# EAGLE board Lecture10_Example (EAGLE 9.0.1)
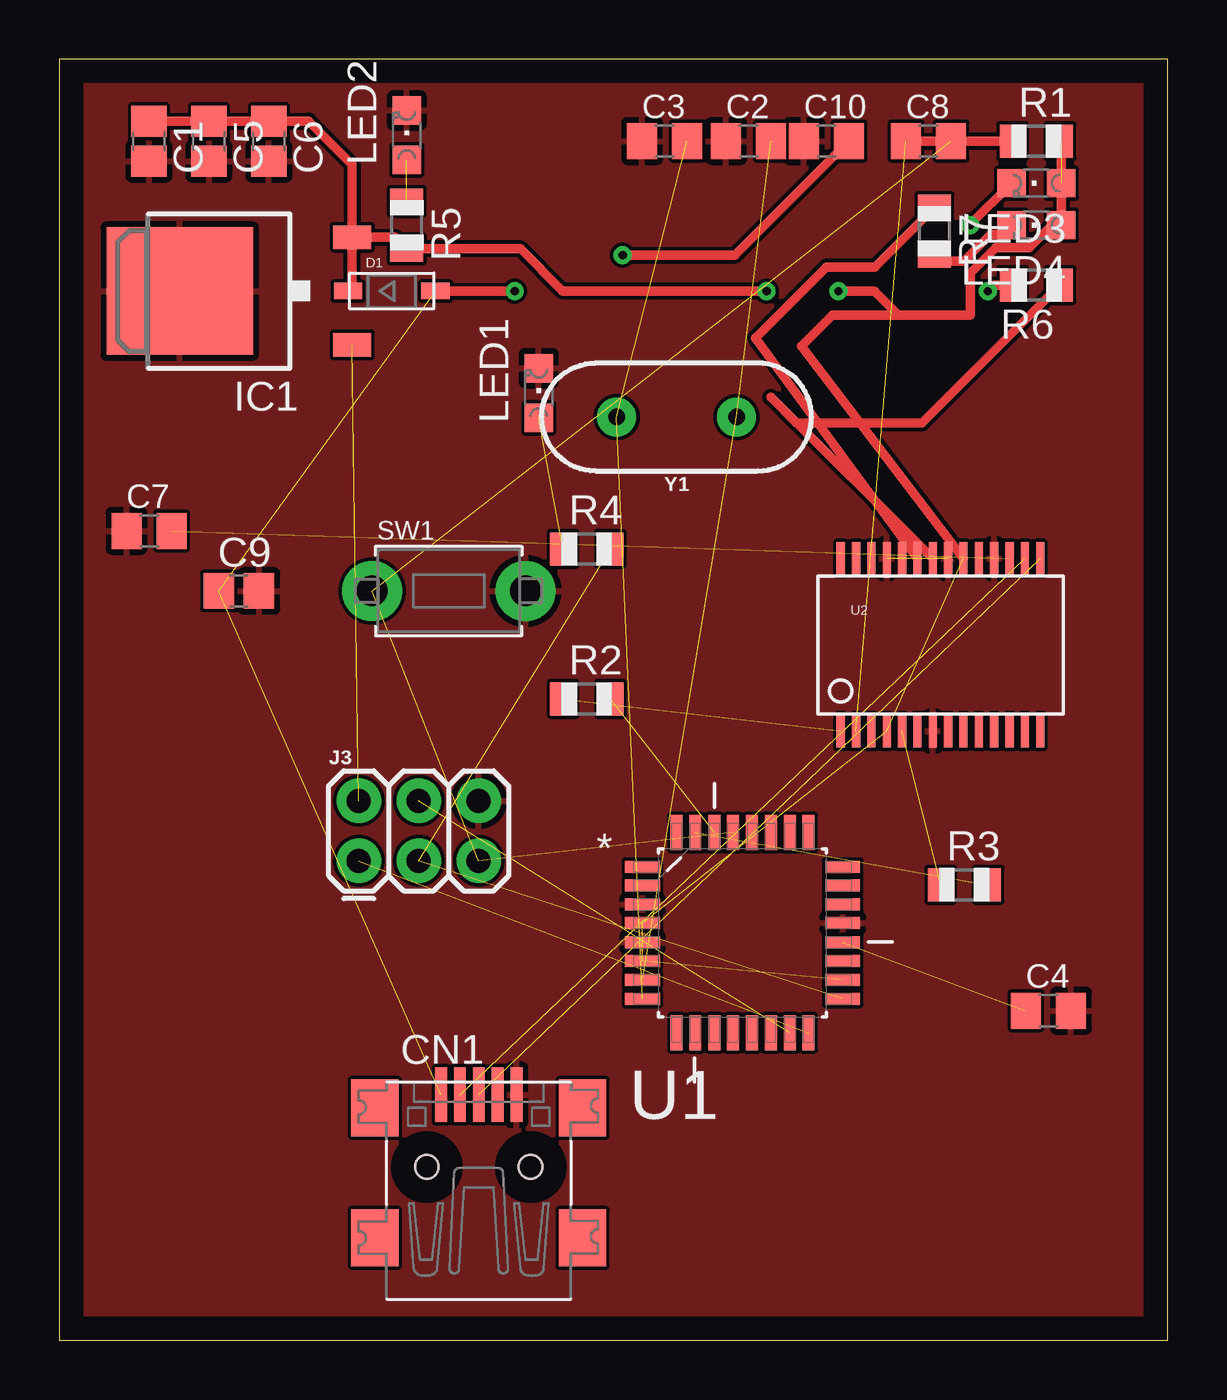
[diagram p0: board, top side]
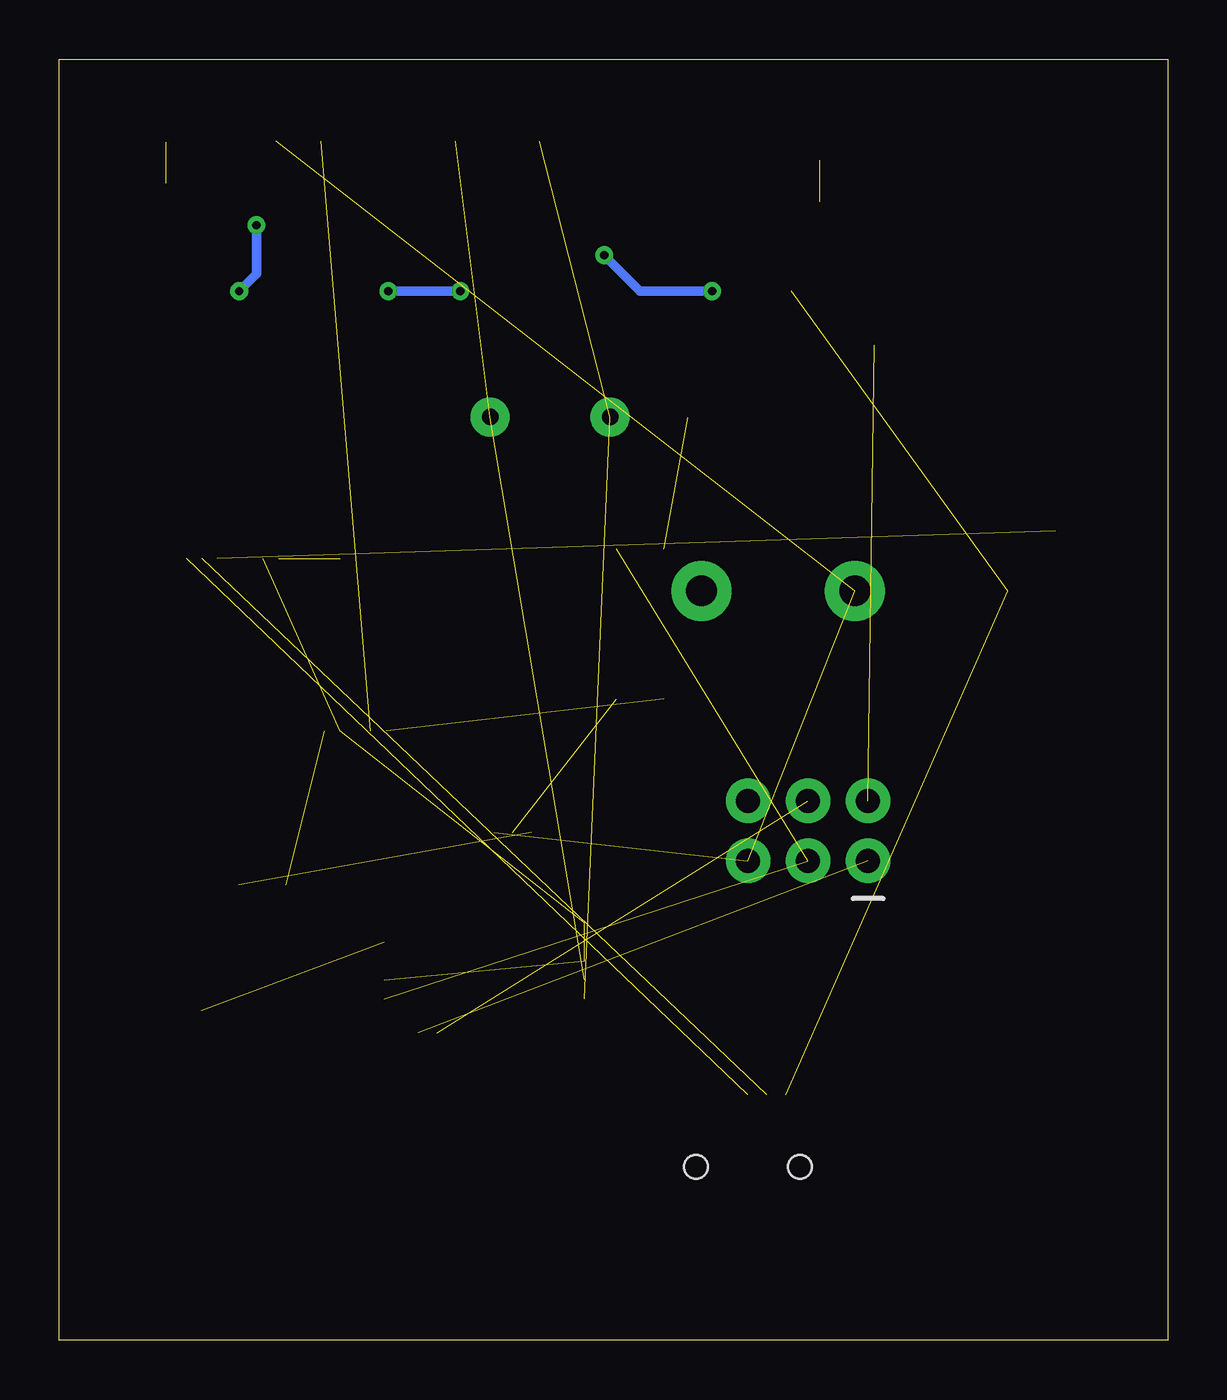
[diagram p1: board, bottom side, seen from below]

Size 46.97 x 54.28 mm. Coordinates in mm from the lower left corner, seen from the top.
Outline: 0,0 46.97,0 46.97,54.28 0,54.28 0,0
Copper layers (1*16): Top 0.035mm / dielectric 1.5mm / Bottom 0.035mm
Design rules "default": minimum track width 6mil, minimum drill 0.35mm, track to track 6mil, track to pad 6mil, pad to pad 6mil, via to via 6mil, smd to smd 6mil, copper to edge 40mil, drill to drill 6mil, minimum pad ring 10mil, minimum via ring 8mil, stop-mask expansion 4mil, vias tented up to drill 0mil, thermal gap 10mil

## Footprints (pad centres in the part's own frame; a part is rotated, then mirrored left to right if it is on the bottom)
C0805 = smd 1.3 x 1.5: 1 -0.85,0; 2 0.85,0
0805 = smd 1.27 x 1.524: 1 -0.953,0; 2 0.953,0
USB-MINIB = smd 0.5 x 2.308: D+ 0,4.064; D- -0.8,4.064; GND 1.6,4.064; ID 0.8,4.064; VBUS -1.6,4.064 | smd 2 x 2.4: GND1 -4.4,-2; GND2 -4.4,3.5; GND3 4.4,3.5; GND4 4.4,-2 | hole 1: -2.2,1; 2.2,1
SOD-123 = smd 1.2 x 0.7: A 1.85,0; C -1.85,0
TO252 = smd 1 x 1.6: 1 -2.28,-4.8; 2 2.28,-4.8 | smd 5.4 x 6.2: 3 0,2.5
2X3 = drill 1.016 pad 1.88: 1 0,0; 2 0,2.54; 3 2.54,0; 4 2.54,2.54; 5 5.08,0; 6 5.08,2.54
CHIPLED_0805 = smd 1.2 x 1.2: A 0,-1.05; C 0,1.05
R0805 = smd 1.1 x 1.4: 1 -1,0; 2 1,0
TACT_PANA-EVQ = drill 1.3 pad 2.54: P$1 -3.25,0; P$2 3.25,0
QFP80P900X900X120-32N = smd 1.473 x 0.508: 1 -4.242,2.794; 2 -4.242,2.007; 3 -4.242,1.194; 4 -4.242,0.406; 5 -4.242,-0.406; 6 -4.242,-1.194; 7 -4.242,-2.007; 8 -4.242,-2.794; 17 4.242,-2.794; 18 4.242,-2.007; 19 4.242,-1.194; 20 4.242,-0.406; 21 4.242,0.406; 22 4.242,1.194; 23 4.242,2.007; 24 4.242,2.794 | smd 0.508 x 1.473: 9 -2.794,-4.242; 10 -2.007,-4.242; 11 -1.194,-4.242; 12 -0.406,-4.242; 13 0.406,-4.242; 14 1.194,-4.242; 15 2.007,-4.242; 16 2.794,-4.242; 25 2.794,4.242; 26 2.007,4.242; 27 1.194,4.242; 28 0.406,4.242; 29 -0.406,4.242; 30 -1.194,4.242; 31 -2.007,4.242; 32 -2.794,4.242
SSOP28DB = smd 0.348 x 1.397: 1 -4.225,-3.656; 2 -3.575,-3.656; 3 -2.925,-3.656; 4 -2.275,-3.656; 5 -1.625,-3.656; 6 -0.975,-3.656; 7 -0.325,-3.656; 8 0.325,-3.656; 9 0.975,-3.656; 10 1.625,-3.656; 11 2.275,-3.656; 12 2.925,-3.656; 13 3.575,-3.656; 14 4.225,-3.656; 15 4.225,3.656; 16 3.575,3.656; 17 2.925,3.656; 18 2.275,3.656; 19 1.625,3.656; 20 0.975,3.656; 21 0.325,3.656; 22 -0.325,3.656; 23 -0.975,3.656; 24 -1.625,3.656; 25 -2.275,3.656; 26 -2.925,3.656; 27 -3.575,3.656; 28 -4.225,3.656
HC49US = drill 0.7 pad 1.651: 1 -2.54,0; 2 2.54,0

## Placement (x,y rotation side)
C1  0.1uF  [C0805]  3.81,50.8 270 top
C2  15pF  [0805]  29.21,50.8 0 top
C3  15pF  [0805]  25.65,50.8 0 top
C4  0.1uF  [0805]  41.91,13.97 0 top
C5  4.7uF  [C0805]  6.35,50.8 270 top
C6  4.7uF  [C0805]  8.89,50.8 270 top
C7  0.1uF  [0805]  3.81,34.29 0 top
C8  0.1uF  [0805]  36.83,50.8 0 top
C9  4.7uF  [C0805]  7.62,31.75 0 top
C10  0.1uF  [0805]  32.51,50.8 0 top
CN1  [USB-MINIB]  17.78,6.35 0 top
D1  [SOD-123]  14.1,44.45 0 top
IC1  7824DT  [TO252]  7.62,44.45 90 top
J3  FEMALE 2x3  [2X3]  12.7,20.32 0 top
LED1  [CHIPLED_0805]  20.32,40.13 0 top
LED2  [CHIPLED_0805]  14.73,51.05 0 top
LED3  [CHIPLED_0805]  41.4,49.02 90 top
LED4  [CHIPLED_0805]  41.4,47.24 90 top
R1  680  [R0805]  41.4,50.8 0 top
R2  100  [R0805]  22.35,27.18 0 top
R3  100  [R0805]  38.35,19.3 0 top
R4  680  [R0805]  22.35,33.53 0 top
R5  680  [R0805]  14.73,47.24 270 top
R6  680  [R0805]  41.4,44.7 180 top
R7  680  [R0805]  37.08,46.99 270 top
SW1  [TACT_PANA-EVQ]  16.51,31.75 0 top
U1  ATMEGA328P-AU  [QFP80P900X900X120-32N]  28.96,17.27 0 top
U2  [SSOP28DB]  37.34,29.46 0 top
Y1  16MHz  [HC49US]  26.16,39.12 180 top

## Library data of the parts
C1 C5 C6 C9 CN1 D1 IC1 LED1-LED4 R1-R7 SW1 = adafruit
C2-C4 C7 C8 C10 = cap-master
J3 = SparkFun-Connectors; PROD_ID: CONN-11566
U1 = Atmel-ATMEGA328P-AU; DESCRIPTION: 8-bit Microcontroller with In-System Programmable Flash; MPN: ATMEGA328P-AU; OC_FARNELL: 1715486; OC_NEWARK: 14R4631; PACKAGE: TQFP-32; SUPPLIER: Atmel
U2 = microbuilder
Y1 = SparkFun-Clocks; PROD_ID: XTAL-08181; SF_ID: COM-00536

## Nets
3.3V: C7.2 U2.17
+5V: C1.1 C5.1 C6.1 D1.C IC1.2 LED3.A LED4.A R1.2 R5.2 U1.4 U1.6 U1.18 U2.4 U2.20
A0: U1.23
A1: U1.24
A2: U1.25
A3: U1.26
A4: U1.27
A5: U1.28
A6: U1.19
A7: U1.22
AREF: C4.1 U1.20
D0/RX: R2.1 U2.1
D1/TX: R3.1 U2.5
D2: U1.32
D3: U1.1
D4: U1.2
D5: U1.9
D6: U1.10
D7: U1.11
D8: U1.12
D9: U1.13
D10: U1.14
D11/MOSI: J3.4 U1.15
D12/MISO: J3.1 U1.16
D13/SCK: J3.3 R4.2 U1.17
GND: C1.2 C2.1 C3.1 C4.2 C5.2 C6.2 C7.1 C9.2 C10.1 CN1.GND IC1.3 J3.6 LED1.C LED2.C SW1.P$2 U1.3 U1.5 U1.21 U2.7 U2.18 U2.21 U2.25
N$1: C3.2 U1.8 Y1.2
N$2: C2.2 U1.7 Y1.1
N$4: LED2.A R5.1
N$5: CN1.D+ U2.15
N$6: CN1.D- U2.16
N$7: R2.2 U1.30
N$8: R3.2 U1.31
N$9: LED3.C R6.2
N$10: LED1.A R4.1
N$12: R6.1 U2.22
N$13: R7.1 U2.23
N$14: C8.1 U2.2
N$15: LED4.C R7.2
RESET: C8.2 J3.5 R1.1 SW1.P$1 U1.29
VIN: IC1.1 J3.2
VUSB: C9.1 C10.2 CN1.VBUS D1.A

## Tracks (layer width: path | path; a pad name or v marks a point on that pad's centre or on a via)
3.3V  (1 unrouted)
+5V  (via drill 0.35)  (5 unrouted)
  Top 0.406: C1.1 C5.1 C6.1 10.58,51.65 12.42,49.81 IC1.2 | D1.C 12.42,44.62 IC1.2 | IC1.2 14.25,46.73 R5.2 19.54,46.24 21.34,44.45 v29.97,44.45 | 42.42,50.78 R1.2 42.45,50.75 LED4.A 42.05,47.24 41.1,46.29 39.68,46.29 38.61,45.21 38.61,43.43 35.56,43.43 | 35.56,43.43 32.77,43.43 31.45,42.12 U2.20 | 35.56,43.43 34.54,44.45 v33.02,44.45
  Bottom 0.406: v33.02,44.45 v29.97,44.45
AREF  (1 unrouted)
D0/RX  (1 unrouted)
D1/TX  (1 unrouted)
D11/MOSI  (1 unrouted)
D12/MISO  (1 unrouted)
D13/SCK  (2 unrouted)
GND  (1 unrouted)
  pour Top: 0,0 0,54.61 46.99,54.61 46.99,0
N$1  (2 unrouted)
N$2  (2 unrouted)
N$4  (1 unrouted)
N$5  (1 unrouted)
N$6  (1 unrouted)
N$7  (1 unrouted)
N$8  (1 unrouted)
N$9  (via drill 0.35)
  Top 0.406: LED3.C 38.61,47.28 v38.61,47.24 | v39.34,44.45 39.6,44.7 R6.2
  Bottom 0.406: v38.61,47.24 38.61,45.18 v39.34,44.45
N$10  (1 unrouted)
N$12
  Top 0.406: R6.1 36.56,38.86 31.24,38.86 30.16,39.95 U2.22
N$13
  Top 0.406: R7.1 34.56,45.47 32.51,45.47 29.5,42.46 U2.23
N$14  (1 unrouted)
  Top 0.406: C8.1 37.5,50.8
N$15
  Top 0.406: LED4.C 39.95,46.85 39.45,46.85 38.33,45.72 37.35,45.72 R7.2
RESET  (3 unrouted)
  Top 0.406: 38.06,50.8 R1.1 C8.2
VIN  (1 unrouted)
VUSB  (via drill 0.35)  (2 unrouted)
  Top 0.406: D1.A v19.3,44.45 | v23.88,45.97 28.64,45.97 C10.2
  Bottom 0.406: v19.3,44.45 22.35,44.45 v23.88,45.97